# EAGLE board tinymarquee (EAGLE 6.0)

Size 101.6 x 25.4 mm. Coordinates in mm from the lower left corner, seen from the top.
Outline: 0,0 0,25.4 101.6,25.4 101.6,0 0,0
Copper layers (1*16): Top 0.035mm / dielectric 1.5mm / Bottom 0.035mm
Design rules: minimum track width 10mil, minimum drill 24mil, track to track 8mil, track to pad 8mil, pad to pad 8mil, via to via 8mil, smd to smd 8mil, copper to edge 40mil, drill to drill 8mil, minimum pad ring 10mil, minimum via ring 8mil, stop-mask expansion 4mil, vias tented up to drill 0mil, thermal gap 10mil
Holes 3.2 mm at 5.08,5.08 96.52,20.32 96.52,5.08 5.08,20.32

## Footprints (pad centres in the part's own frame; a part is rotated, then mirrored left to right if it is on the bottom)
LED3MM = drill 0.813 octagon: A -1.27,0; K 1.27,0
1X01 = drill 1.016 octagon: 1 0,0

## Placement (x,y rotation side)
00  [LED3MM]  2.54,2.54 0 top
0A  [LED3MM]  53.34,2.54 0 top
01  [LED3MM]  7.62,2.54 0 top
1A  [LED3MM]  53.34,7.62 0 top
02  [LED3MM]  12.7,2.54 0 top
2A  [LED3MM]  53.34,12.7 0 top
03  [LED3MM]  17.78,2.54 0 top
3A  [LED3MM]  53.34,17.78 0 top
04  [LED3MM]  22.86,2.54 0 top
4A  [LED3MM]  53.34,22.86 0 top
05  [LED3MM]  27.94,2.54 0 top
06  [LED3MM]  33.02,2.54 0 top
07  [LED3MM]  38.1,2.54 0 top
08  [LED3MM]  43.18,2.54 0 top
09  [LED3MM]  48.26,2.54 0 top
10  [LED3MM]  2.54,7.62 0 top
11  [LED3MM]  7.62,7.62 0 top
12  [LED3MM]  12.7,7.62 0 top
13  [LED3MM]  17.78,7.62 0 top
14  [LED3MM]  22.86,7.62 0 top
15  [LED3MM]  27.94,7.62 0 top
16  [LED3MM]  33.02,7.62 0 top
17  [LED3MM]  38.1,7.62 0 top
18  [LED3MM]  43.18,7.62 0 top
19  [LED3MM]  48.26,7.62 0 top
20  [LED3MM]  2.54,12.7 0 top
21  [LED3MM]  7.62,12.7 0 top
22  [LED3MM]  12.7,12.7 0 top
23  [LED3MM]  17.78,12.7 0 top
24  [LED3MM]  22.86,12.7 0 top
25  [LED3MM]  27.94,12.7 0 top
26  [LED3MM]  33.02,12.7 0 top
27  [LED3MM]  38.1,12.7 0 top
28  [LED3MM]  43.18,12.7 0 top
29  [LED3MM]  48.26,12.7 0 top
30  [LED3MM]  2.54,17.78 0 top
31  [LED3MM]  7.62,17.78 0 top
32  [LED3MM]  12.7,17.78 0 top
33  [LED3MM]  17.78,17.78 0 top
34  [LED3MM]  22.86,17.78 0 top
35  [LED3MM]  27.94,17.78 0 top
36  [LED3MM]  33.02,17.78 0 top
37  [LED3MM]  38.1,17.78 0 top
38  [LED3MM]  43.18,17.78 0 top
39  [LED3MM]  48.26,17.78 0 top
40  [LED3MM]  2.54,22.86 0 top
41  [LED3MM]  7.62,22.86 0 top
42  [LED3MM]  12.7,22.86 0 top
43  [LED3MM]  17.78,22.86 0 top
44  [LED3MM]  22.86,22.86 0 top
45  [LED3MM]  27.94,22.86 0 top
46  [LED3MM]  33.02,22.86 0 top
47  [LED3MM]  38.1,22.86 0 top
48  [LED3MM]  43.18,22.86 0 top
49  [LED3MM]  48.26,22.86 0 top
50  [LED3MM]  58.42,2.54 0 top
51  [LED3MM]  63.5,2.54 0 top
52  [LED3MM]  68.58,2.54 0 top
53  [LED3MM]  73.66,2.54 0 top
54  [LED3MM]  78.74,2.54 0 top
55  [LED3MM]  83.82,2.54 0 top
56  [LED3MM]  88.9,2.54 0 top
57  [LED3MM]  93.98,2.54 0 top
58  [LED3MM]  99.06,2.54 0 top
60  [LED3MM]  58.42,7.62 0 top
61  [LED3MM]  63.5,7.62 0 top
62  [LED3MM]  68.58,7.62 0 top
63  [LED3MM]  73.66,7.62 0 top
64  [LED3MM]  78.74,7.62 0 top
65  [LED3MM]  83.82,7.62 0 top
66  [LED3MM]  88.9,7.62 0 top
67  [LED3MM]  93.98,7.62 0 top
68  [LED3MM]  99.06,7.62 0 top
70  [LED3MM]  58.42,12.7 0 top
71  [LED3MM]  63.5,12.7 0 top
72  [LED3MM]  68.58,12.7 0 top
73  [LED3MM]  73.66,12.7 0 top
74  [LED3MM]  78.74,12.7 0 top
75  [LED3MM]  83.82,12.7 0 top
76  [LED3MM]  88.9,12.7 0 top
77  [LED3MM]  93.98,12.7 0 top
78  [LED3MM]  99.06,12.7 0 top
80  [LED3MM]  58.42,17.78 0 top
81  [LED3MM]  63.5,17.78 0 top
82  [LED3MM]  68.58,17.78 0 top
83  [LED3MM]  73.66,17.78 0 top
84  [LED3MM]  78.74,17.78 0 top
85  [LED3MM]  83.82,17.78 0 top
86  [LED3MM]  88.9,17.78 0 top
87  [LED3MM]  93.98,17.78 0 top
88  [LED3MM]  99.06,17.78 0 top
90  [LED3MM]  58.42,22.86 0 top
91  [LED3MM]  63.5,22.86 0 top
92  [LED3MM]  68.58,22.86 0 top
93  [LED3MM]  73.66,22.86 0 top
94  [LED3MM]  78.74,22.86 0 top
95  [LED3MM]  83.82,22.86 0 top
96  [LED3MM]  88.9,22.86 0 top
97  [LED3MM]  93.98,22.86 0 top
98  [LED3MM]  99.06,22.86 0 top
H0  [1X01]  16.51,5.08 0 top
H1  [1X01]  19.05,5.08 0 top
H2  [1X01]  21.59,5.08 0 top
H3  [1X01]  24.13,5.08 0 top
H4  [1X01]  26.67,5.08 0 top
H5  [1X01]  29.21,5.08 0 top
H6  [1X01]  31.75,5.08 0 top
H7  [1X01]  34.29,5.08 0 top
H8  [1X01]  36.83,5.08 0 top
H9  [1X01]  39.37,5.08 0 top
H10  [1X01]  41.91,5.08 0 top
H11  [1X01]  44.45,5.08 0 top

## Library data of the parts
00 0A 01 1A 02 2A 03 3A 04 4A 05-09 10-58 60-68 70-78 80-88 90-98 = led
H0 H1-H11 = pinhead

## Nets
D: 00.A 11.A 22.A 33.A 44.A 55.A 66.A 77.A 88.A H11.1
S0: 00.K 0A.A 01.A 02.A 03.A 04.A 05.A 06.A 07.A 08.A 09.A 10.K 20.K 30.K 40.K 50.K 60.K 70.K 80.K 90.K H0.1
S1: 01.K 1A.A 10.A 11.K 12.A 13.A 14.A 15.A 16.A 17.A 18.A 19.A 21.K 31.K 41.K 51.K 61.K 71.K 81.K 91.K H1.1
S2: 02.K 2A.A 12.K 20.A 21.A 22.K 23.A 24.A 25.A 26.A 27.A 28.A 29.A 32.K 42.K 52.K 62.K 72.K 82.K 92.K H2.1
S3: 03.K 3A.A 13.K 23.K 30.A 31.A 32.A 33.K 34.A 35.A 36.A 37.A 38.A 39.A 43.K 53.K 63.K 73.K 83.K 93.K H3.1
S4: 04.K 4A.A 14.K 24.K 34.K 40.A 41.A 42.A 43.A 44.K 45.A 46.A 47.A 48.A 49.A 54.K 64.K 74.K 84.K 94.K H4.1
S5: 05.K 15.K 25.K 35.K 45.K 50.A 51.A 52.A 53.A 54.A 55.K 56.A 57.A 58.A 65.K 75.K 85.K 95.K H5.1
S6: 06.K 16.K 26.K 36.K 46.K 56.K 60.A 61.A 62.A 63.A 64.A 65.A 66.K 67.A 68.A 76.K 86.K 96.K H6.1
S7: 07.K 17.K 27.K 37.K 47.K 57.K 67.K 70.A 71.A 72.A 73.A 74.A 75.A 76.A 77.K 78.A 87.K 97.K H7.1
S8: 08.K 18.K 28.K 38.K 48.K 58.K 68.K 78.K 80.A 81.A 82.A 83.A 84.A 85.A 86.A 87.A 88.K 98.K H8.1
S9: 09.K 19.K 29.K 39.K 49.K 90.A 91.A 92.A 93.A 94.A 95.A 96.A 97.A 98.A H9.1
S10: 0A.K 1A.K 2A.K 3A.K 4A.K H10.1

## Tracks (layer width: path | path; a pad name or v marks a point on that pad's centre or on a via)
D  (9 unrouted)
S0  (20 unrouted)
S1  (20 unrouted)
S2  (20 unrouted)
S3  (20 unrouted)
S4  (20 unrouted)
S5  (18 unrouted)
S6  (18 unrouted)
S7  (18 unrouted)
S8  (18 unrouted)
S9  (14 unrouted)
S10  (5 unrouted)